# Altium PCB SAO_Area3001_S_WS2812_00.PcbDoc
Units mm, origin at the board's own origin, x right, y up, seen from the top; angles counter-clockwise.
Board outline 13 x 11 mm, 2 copper layers (Top Layer, Bottom Layer), stack 0.971 mm thick; 8 components, 11 nets, 36 pads, 3 vias.
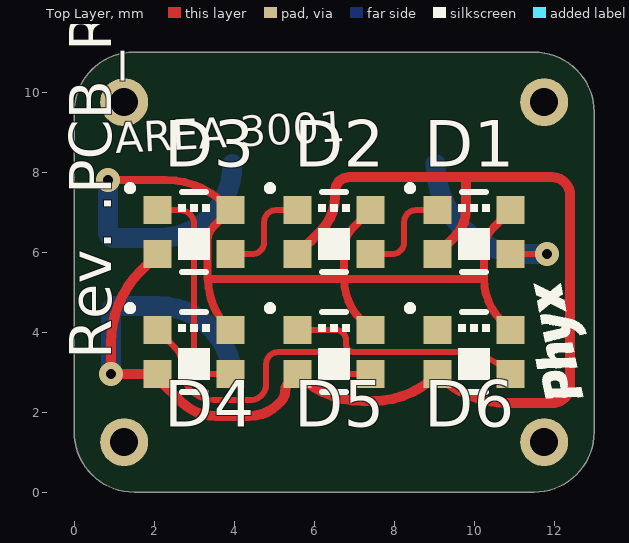
[diagram p0: Top Layer view]
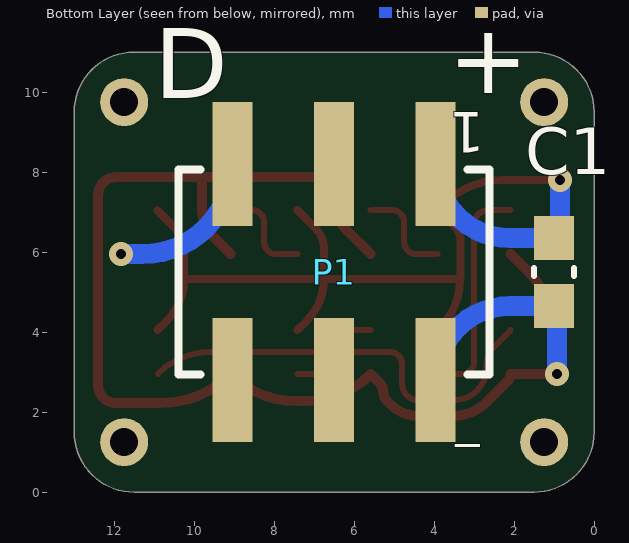
[diagram p1: Bottom Layer view, seen from below]

## Layer stack, top to bottom
Top Solder: solder mask 0.0102, Solder Resist, Dk 3.5
Top Layer: signal copper 0.0356
Dielectric1: core 0.9, FR-4, Dk 4.8
Bottom Layer: signal copper 0.0356
Bottom Solder: solder mask 0.0102, Solder Resist, Dk 3.5

## Board outline
0,1.5 0,9.5 cw(c1.5,9.5) 1.5,11 11.5,11 cw(c11.5,9.5) 13,9.5 13,1.5 cw(c11.5,1.5) 11.5,0 1.5,0 cw(c1.5,1.5)

## Design rules (kind name [scope] priority, off if disabled: settings)
BoardOutlineClearance [NOT OnLayer('Top Overlay') AND NOT OnLayer('Bottom Overlay') AND NOT IsText] p1: gap=0.5 ignorepadtopadclearanceinfootprint=FALSE except(0: Arc-SplitContinuation Track-SplitContinuation SMDPad-SplitContinuation THPad-SplitContinuation Via-SplitContinuation Fill-SplitContinuation Poly-SplitContinuation Region-SplitContinuation Text-SplitContinuation)
Clearance [All] p1: gap=0.15 ignorepadtopadclearanceinfootprint=FALSE except(0: Arc-Hole Track-Hole SMDPad-Hole THPad-Hole Via-Hole Fill-Hole Poly-Hole Region-Hole Text-Hole; 0.125: Arc-SMDPad Track-SMDPad SMDPad-SMDPad; 0.3: Arc-Poly Track-Poly THPad-Poly Via-Poly Fill-Poly; 1.1: Poly-Poly)
HoleSize [All] p1: absolutevalues=TRUE maxlimit=10 minlimit=0.025 maxpercent=80.000 minpercent=20.000
PolygonConnect PolygonConnect_VIA [IsVia] p1: connectstyle=Direct reliefconductorwidth=0.254 reliefentries=4 polygonreliefangle="90 Angle" airgapwidth=0.254
PolygonConnect [All] p2: connectstyle=Relief reliefconductorwidth=0.254 reliefentries=4 polygonreliefangle="90 Angle" airgapwidth=0.254
RoutingVias [All] p1: holewidth=0.3 width=0.7 viastyle="Through Hole" minholewidth=0.3 minwidth=0.2 maxholewidth=0.6 maxwidth=1.2
SilkToSolderMaskClearance SilkscreenOverComponentPads [IsPad] p1: minsilkscreentomaskgap=0.254 clearancetoexposedcopper=TRUE
SolderMaskExpansion [All] p1: expansion=0.05
Width [All] p1: maxlimit=5 minlimit=0.15 preferedwidth=0.25
28 further rules are at their usual default settings.

## Components (designator, comment, footprint, x,y, rotation, side; value= is the part's Value field where it differs from the comment)
C1 "CAP_CERAMIC" C0603_N 1,5.5 r270 bottom value="1uF 16V"
D1 "WS2812 based digital RGB LED 2022 package" LED_2022_WS2812B 10,6.5 r180 top value=WS2812B-2022
D2 "WS2812 based digital RGB LED 2022 package" LED_2022_WS2812B 6.5,6.5 r180 top value=WS2812B-2022
D3 "WS2812 based digital RGB LED 2022 package" LED_2022_WS2812B 3,6.5 r180 top value=WS2812B-2022
D4 "WS2812 based digital RGB LED 2022 package" LED_2022_WS2812B 3,3.5 r180 top value=WS2812B-2022
D5 "WS2812 based digital RGB LED 2022 package" LED_2022_WS2812B 6.5,3.5 r180 top value=WS2812B-2022
D6 "WS2812 based digital RGB LED 2022 package" LED_2022_WS2812B 10,3.5 r180 top value=WS2812B-2022
P1 "Boxed Header 3X2" HDR2X3_SMD 6.5,5.5 r0 bottom

## Footprints (in the part's own frame and the unit in brackets; to place one, negate y for a bottom-side part, rotate by r counter-clockwise, add the part's x,y. Pads: shape width x height; smd on the part's side, far side on the other; paste and mask are expansions set on the pad)
C0603_N [mm] "Low density"
  rect 1.1x1 smd: 1(-0.85,0) 2(0.85,0)
  silkscreen extent -0.1,-0.5 0.1,0.5, body extent -0.8,-0.4 0.8,0.4, height 0.3
HDR2X3_SMD [mm] "Connector; Header; 3x2 Position"
  rect 1x3.1 smd: 1(-2.54,-2.7) 2(-2.54,2.7) 3(0,-2.7) 4(0,2.7) 5(2.54,-2.7) 6(2.54,2.7)
  silkscreen extent -3.89,-2.56 3.89,2.57, body extent -3.81,-3.75 3.81,3.75, height 9.62
LED_2022_WS2812B [mm] "2022 WS2812B based RGB LED"
  rect 0.7x0.7 smd: 1(0.915,-0.55) 2(0.915,0.55) 3(-0.915,0.55) 4(-0.915,-0.55)
  silkscreen extent -0.4,-1.12 1.62,1, body extent -1.1,-1 1.1,1, height 0.84

## Part data
C1: library part "CAP # 1uF 16V 0603", "Capacitor Ceramic", Supplier Part Number 1=2320814, Supplier 1=Farnell
D1 D2 D3 D4 D5 D6: library part "LED # RGB WS2812B-2022", "=Description", Supplier Part Number 1="WS2812B 2020 2022", Supplier 1=Aliexpress
P1: library part "Pin Header 2.54mm dual row 6way Boxed"

## Free pads (board coordinates)
  round 1.2 hole 0.7: 0(1.25,1.25) 0(1.25,9.75) 0(11.75,1.25) 0(11.75,9.75)

## Via types
v1: diameter 0.6, hole 0.25, Top Layer to Bottom Layer, 3 vias

## Nets (pads, with @x,y where several pads share a name; then routed paths per layer and width w, separated by ;. In a path a pad name is that pad's centre, name@x,y a point inside that pad or via, vN(x,y) a via of type N, cw(c..) or ccw(c..) an arc to the next point about the centre after c; other vN are vias at no path point)
GND: C1.2 D1.2 D2.2 D3.2 D4.2 D5.2 D6.2 P1.2 | length 37.5
  Top Layer w0.25: D3.2 1.669,5.534 ccw(c3.465,3.738) 0.925,3.738 v1(0.925,2.95) D4.2 ccw(c2.323,2.95) 2.155,2.782 2.674,2.263 ccw(c3.55,3.139) 3.55,1.9 4.376,1.9 ccw(c4.376,2.924) 5.1,2.2 5.169,2.269 ccw(c4.913,2.525) 5.275,2.525 cw(c5.553,2.525) 5.356,2.721 D5.2 ccw(c7.215,4.58) 7.215,2.275 7.455,2.275 ccw(c7.455,4.58) D6.2 ccw(c10.835,4.7) 10.835,2.225 11.95,2.225 ccw(c11.95,2.675) 12.4,2.675 12.4,7.425 ccw(c11.95,7.425) 11.95,7.875 9.8,7.875 ; D2.2 6.164,6.529 ccw(c5.294,7.4) 6.525,7.4 6.525,7.525 cw(c6.875,7.525) 6.875,7.875 9.8,7.875 ; D1.2 9.51,6.375 ccw(c8.81,7.075) 9.8,7.075 9.8,7.875
  Bottom Layer w0.5: v1(0.925,2.95) 0.925,4.469 cw(c1.181,4.469) C1.2 2.11,4.65 cw(c2.11,2.8) P1.2
I2C.SCL: P1.4
I2C.SDA: P1.3
LED.CLK: P1.6
LED.DATA: D1.3 P1.5 | length 5
  Top Layer w0.15: D1.3 v1@11.8,5.95
  Bottom Layer w0.5: P1.5 ccw(c11.29,8.2) 11.29,5.95 v1(11.825,5.95)
NetD1_1: D1.1 D2.3 | length 2.5
  Top Layer w0.15: D2.3 7.95,5.95 ccw(c7.95,6.25) 8.25,6.25 8.25,6.75 cw(c8.55,6.75) 8.55,7.05 D1.1
NetD2_1: D2.1 D3.3 | length 2.5
  Top Layer w0.15: D3.3 4.45,5.95 ccw(c4.45,6.25) 4.75,6.25 4.75,6.75 cw(c5.05,6.75) 5.05,7.05 D2.1
NetD3_1: D3.1 D4.3 | length 5.7
  Top Layer w0.15: D3.1 2.65,7.05 cw(c2.65,6.7) 3,6.7 3,3.25 ccw(c3.3,3.25) 3.3,2.95 D4.3
NetD4_1: D4.1 D5.3 | length 7.7
  Top Layer w0.15: D4.1 2.514,3.621 cw(c2.093,3.2) 2.688,3.2 2.688,3.112 ccw(c3.5,3.112) 3.5,2.3 4.4,2.3 ccw(c4.4,2.7) 4.8,2.7 4.8,3.2 cw(c5.1,3.2) 5.1,3.5 6.3,3.5 cw(c6.3,3.3) 6.5,3.3 6.5,3.1 ccw(c6.65,3.1) 6.65,2.95 D5.3
NetD5_1: D5.1 D6.3 | length 5.8
  Top Layer w0.15: D5.1 6.55,4.05 cw(c6.55,3.8) 6.8,3.8 6.8,3.696 ccw(c6.996,3.696) 6.996,3.5 9.6,3.5 cw(c9.6,1.653) D6.3@10.906,2.959
VCC: C1.1 D1.4 D2.4 D3.4 D4.4 D5.4 D6.4 P1.1 | length 26
  Top Layer w0.2: v1(0.85,7.8) 2.3,7.8 cw(c2.3,5.712) 3.777,7.188 D3.4 ccw(c3.915,7.014) 3.889,7.039 3.475,6.625 ccw(c3.801,6.299) 3.34,6.299 3.34,5.325 3.35,5.325 ; D4.4 3.852,4.113 cw(c5.064,5.325) 3.35,5.325 ; D5.4 7.181,4.284 7.181,4.294 cw(c8.223,5.335) 6.75,5.325 ; D2.4 6.975,6.61 ccw(c7.518,6.067) 6.75,6.067 6.75,5.335 ccw(c8.223,5.335) 6.75,5.325 ; D6.4 10.681,4.284 cw(c11.723,5.325) 10.25,5.325 ; D1.4@10.915,7.04 10.475,6.6 ccw(c11.018,6.057) 10.25,6.057 10.25,5.325 ; 3.35,5.325 6.75,5.325 ; 6.75,5.325 10.25,5.325
  Bottom Layer w0.5: v1(0.85,7.8) 0.85,6.5 ccw(c1,6.5) C1.1 2.11,6.35 ccw(c2.11,8.2) P1.1
pads on no net: D6.1

## Keep-outs
Keep-Out Layer:
  text ".Layer_Name" at 264.902,-46.311 h3.5

## Other copper
Top Layer:
  text ".Layer_Name" at 264.902,-46.311 h3.5
Bottom Layer:
  text ".Layer_Name" at 264.902,-46.311 h3.5

## Silkscreen, mask and mechanical layers (free items; w line width, h text height)
Top Overlay:
  drawing of 4 lines, arcs and shapes, not listed
  text "AREA 3001" at 1.05,8.225 h1.3 r3
  text "Rev. .PCB_Rev" at 1.275,3.325 h1.8 r90
  text ".Layer_Name" at 264.902,-46.311 h3.5
Bottom Overlay:
  text "+" at 3.65,9.4 h3
  text "D" at 11,9.275 h3
  text "-" at 3.6,0 h3
  text ".Layer_Name" at 264.902,-46.311 h3.5
Top Paste:
  text ".Layer_Name" at 264.902,-46.311 h3.5
Bottom Paste:
  text ".Layer_Name" at 264.902,-46.311 h3.5
Top Solder:
  region: 6.475,21.5
  text ".Layer_Name" at 264.902,-46.311 h3.5
Bottom Solder:
  text ".Layer_Name" at 264.902,-46.311 h3.5
Drill Guide:
  text ".Layer_Name" at 264.902,-46.311 h3.5
3D Symbols:
  text ".Layer_Name" at 264.902,-46.311 h3.5
Outline:
  the board outline again, w0.1
Comments:
  text "AREA / 3001" at 0.5,2 h3
  text ".Layer_Name" at 264.902,-46.311 h3.5
Fabrication:
  text "Black Solder Mask" at -16,-7 h1.5
  text "White Silkscreen" at -16,-10 h1.5
  text "1mm Thickness" at -16,-13 h1.5
  text ".Layer_Name" at 264.902,-46.311 h3.5
Placebound Top:
  text ".Layer_Name" at 264.902,-46.311 h3.5
Placebound Bottom:
  text ".Layer_Name" at 264.902,-46.311 h3.5
Frame:
  drawing of 15 lines, arcs and shapes, not listed
  text "Document" at 260.402,-31.311 h2
  text ".PCB_TITLE" at 261.902,-36.811 h3
  text "Layer Name" at 260.402,-41.311 h2
  text "Date" at 260.402,-51.311 h2
  text "Rev" at 300.402,-51.311 h2
  text ".Print_Date" at 263.402,-56.811 h3.5
  text ".PCB_REV" at 304.902,-56.811 h4
  text "Desginer" at 210.402,-61.311 h2
  text "Document" at 260.402,-61.311 h2
  text ".Pcb_File_Name_No_Path" at 261.902,-66.311 h1.5
  text ".PCB_ENGINEER" at 214.902,-66.811 h4
Assembly Top:
  text ".Layer_Name" at 264.902,-46.311 h3.5
Assembly Bottom:
  text ".Layer_Name" at 264.902,-46.311 h3.5
Drill Drawing:
  circle w0.15: c118.523,5.444 r0.444
  lines w0.15: 117.276,4.4 286.822,4.4 ; 117.276,8.4 286.822,8.4 ; 124.674,2.4 124.674,10.4 ; 131.106,2.4 131.106,10.4 ; 146.068,2.4 146.068,10.4 ; 152.867,2.4 152.867,10.4 ; 162.704,2.4 162.704,10.4 ; 182.732,2.4 182.732,10.4 ; 190.65,2.4 190.65,10.4 ; 200.647,2.4 200.647,10.4 ; 209.365,2.4 209.365,10.4 ; 220.801,2.4 220.801,10.4 ; 238.636,2.4 238.636,10.4 ; 256.471,2.4 256.471,10.4 ; 268.068,2.4 268.068,10.4 ; 117.276,2.4 286.822,2.4 286.822,10.4 117.276,10.4 117.276,2.4 ; 118.079,7 118.967,7 118.967,7.889 118.079,7.889 118.079,7
  text "Symbol" at 118.476,9 h0.96
  text "Count" at 125.274,9 h0.96
  text "Hole Size" at 131.706,9 h0.96
  text "Plated" at 146.668,9 h0.96
  text "Hole Type" at 153.467,9 h0.96
  text "Drill Layer Pair" at 163.304,9 h0.96
  text "Via/Pad" at 183.332,9 h0.96
  text "Pad Shape" at 191.25,9 h0.96
  text "Template" at 201.247,9 h0.96
  text "Description" at 209.965,9 h0.96
  text "Hole Tolerance (+)" at 221.401,9 h0.96
  text "Hole Tolerance (-)" at 239.236,9 h0.96
  text "Hole Length" at 257.071,9 h0.96
  text "Routed Path Length" at 268.668,9 h0.96
  text "3" at 125.274,7 h0.8
  text "0,250mm (9,84mil)" at 131.706,7 h0.8
  text "PTH" at 146.668,7 h0.8
  text "Round" at 153.467,7 h0.8
  text "Top Layer - Bottom Layer" at 163.304,7 h0.8
  text "Via" at 183.332,7 h0.8
  text "Rounded" at 191.25,7 h0.8
  text "v60h25m35" at 201.247,7 h0.8
  text "-" at 257.071,7 h0.8
  text "-" at 268.668,7 h0.8
  text "4" at 125.274,5 h0.8
  text "0,700mm (27,56mil)" at 131.706,5 h0.8
  text "PTH" at 146.668,5 h0.8
  text "Round" at 153.467,5 h0.8
  text "Top Layer - Bottom Layer" at 163.304,5 h0.8
  text "Pad" at 183.332,5 h0.8
  text "Rounded" at 191.25,5 h0.8
  text "c120h70" at 201.247,5 h0.8
  text "-" at 257.071,5 h0.8
  text "-" at 268.668,5 h0.8
  text "7 Total" at 125.274,3 h0.8
  text ".Layer_Name" at 264.902,-46.311 h3.5

## Dimensions
0,9.5 to 13,9.5 on Fabrication
1.5,11 to 11.5,0 on Fabrication

## Text inside footprints (layer, text, board x,y; h text height)
P1: Bottom Overlay "1" at 2.73,9.5 h1.02 r180